# Altium PCB PCB1.PcbDoc
Units mm, origin at the board's own origin, x right, y up, seen from the top; angles counter-clockwise.
Board outline 74.3 x 37.72 mm, 2 copper layers (Top Layer, Bottom Layer); 7 components, 10 nets, 33 pads, 0 vias.
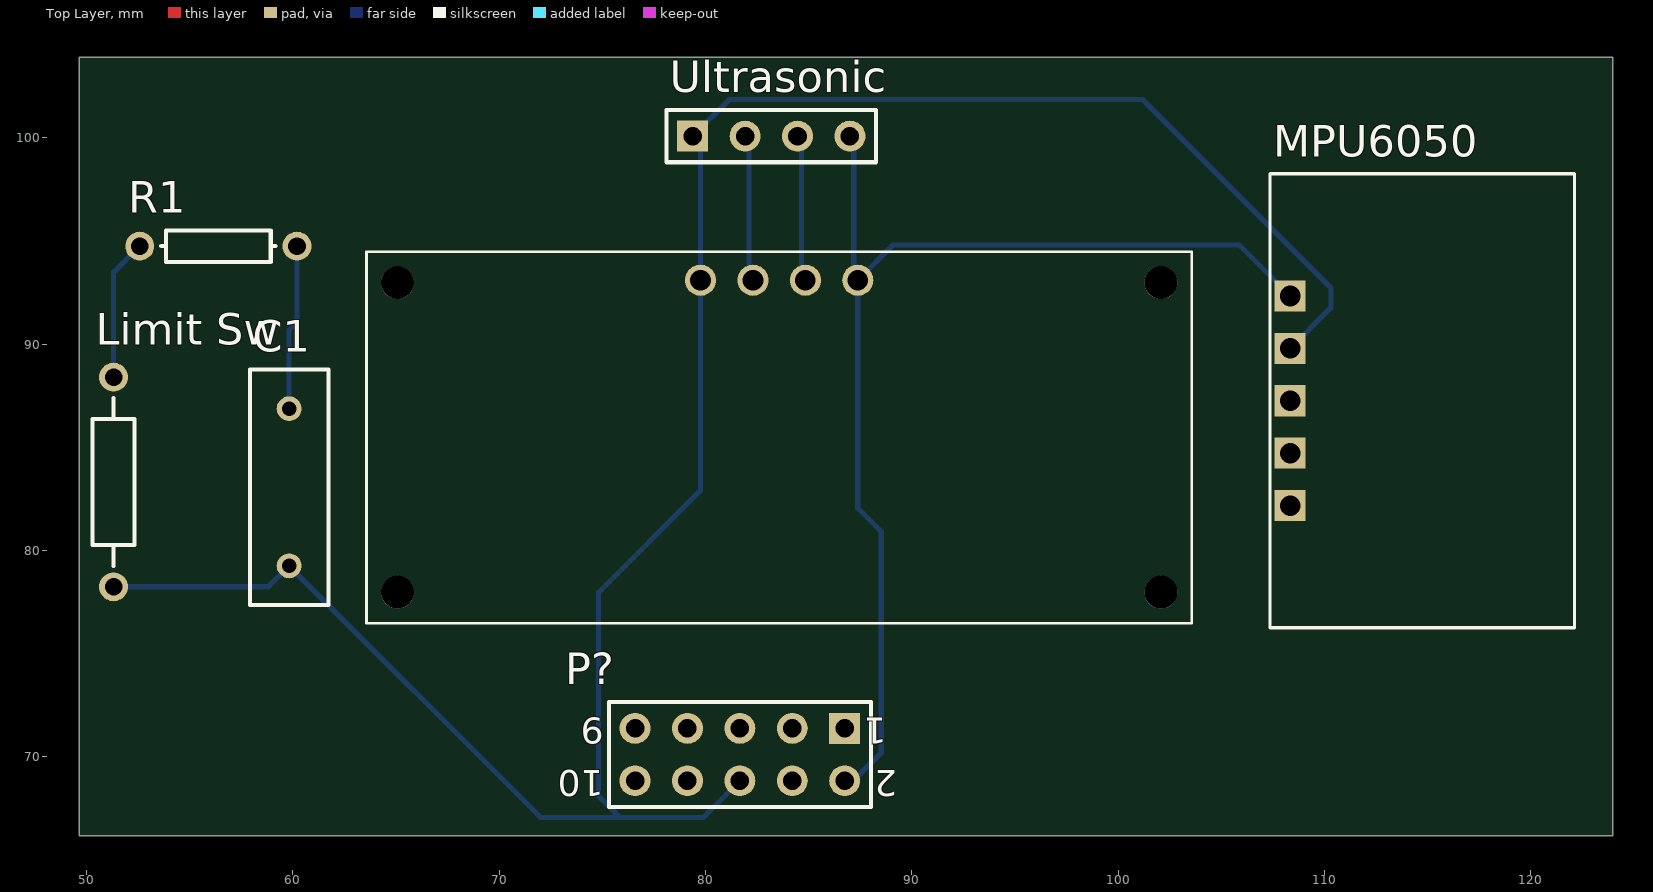
[diagram p0: Top Layer view]
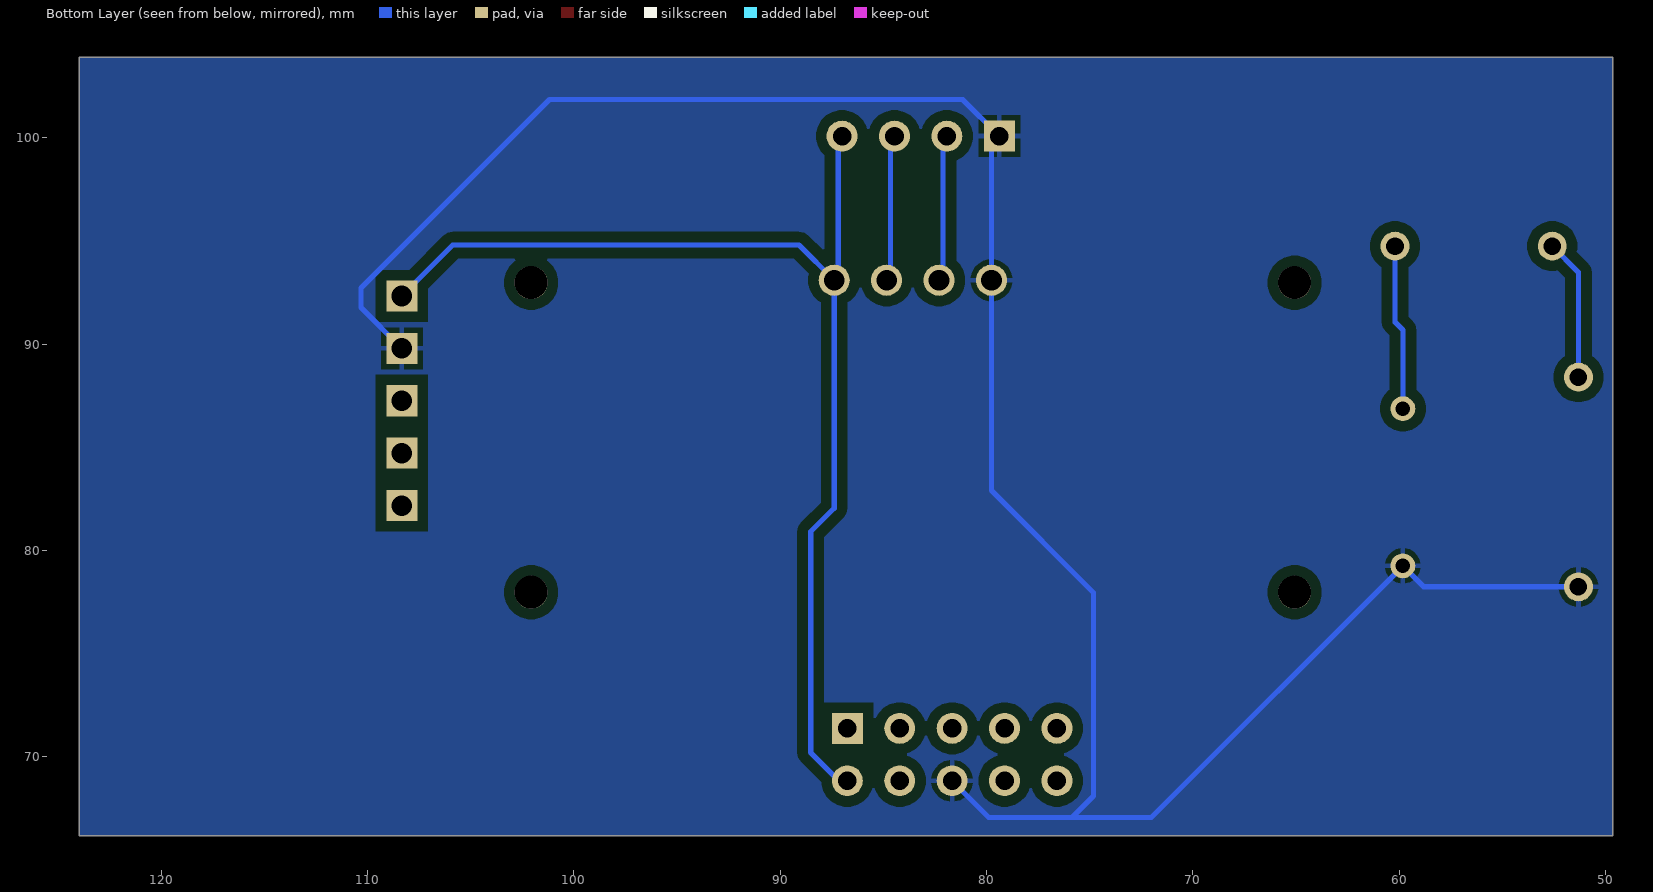
[diagram p1: Bottom Layer view, seen from below]

## Layer stack, top to bottom
Top Solder: solder mask 0.0102, Solder Resist, Dk 3.5
Top Layer: signal copper 0.0356
Dielectric 1: dielectric 0.32, FR-4, Dk 4.8
Bottom Layer: signal copper 0.0356
Bottom Solder: solder mask 0.0102, Solder Resist, Dk 3.5

## Board outline
49.657,66.167 123.952,66.167 123.952,103.886 49.657,103.886

## Design rules (kind name [scope] priority, off if disabled: settings)
Clearance [All] p1: gap=0.5 ignorepadtopadclearanceinfootprint=FALSE
HoleToHoleClearance [All] p1: gap=0.5 allowstackedmicrovias=TRUE
PolygonConnect [All] p1: connectstyle=Relief reliefconductorwidth=0.254 reliefentries=4 polygonreliefangle="90 Angle" airgapwidth=0.254
RoutingLayers [All] p1: top layer_v5=FALSE bottom layer_v5=TRUE
RoutingVias [All] p1: holewidth=0.711 width=1.27 viastyle="Through Hole" minholewidth=0.711 minwidth=1.27 maxholewidth=0.711 maxwidth=1.27
ShortCircuit [All] p1: allowed=TRUE
SolderMaskExpansion [All] p1: expansion=0.102 istentingtop=FALSE
Width [All] p1: maxlimit=0.254 minlimit=0.254 preferedwidth=0.254
27 further rules are at their usual default settings.

## Components (designator, comment, footprint, x,y, rotation, side; value= is the part's Value field where it differs from the comment)
C1 "Cap" RAD-0.3 59.817,83.058 r90 top value=100pF
"Limit Sw" "Res2" AXIAL-0.4 51.308,83.312 r90 top
MPU6050 "MPU6050" SEN0142 109.601,87.249 r270 top
P? "Header 5X2" HDR2X5 86.741,71.374 r180 top
R1 "Res1" AXIAL-0.3 56.388,94.742 r0 top value=1K
Ultrasonic "Header 4" HDR1X4 79.375,100.076 r0 top
? "4007" MODULE_4007 83.566,85.471 r180 top

## Footprints (in the part's own frame and the unit in brackets; to place one, negate y for a bottom-side part, rotate by r counter-clockwise, add the part's x,y. Pads: shape width x height; smd on the part's side, far side on the other; paste and mask are expansions set on the pad)
AXIAL-0.3 [mm] "Axial Device, Thru-Hole; 2 Leads; 0.3 in Pin Spacing"
  round 1.4 hole 0.85: 1(-3.81,0) 2(3.81,0)
  silkscreen extent -2.77,-0.76 2.77,0.76
AXIAL-0.4 [mm] "Axial Device, Thru-Hole; 2 Leads; 0.4 in Pin Spacing"
  round 1.4 hole 0.85: 1(-5.08,0) 2(5.08,0)
  silkscreen extent -4.06,-1.02 4.06,1.02
HDR1X4 [mm] "Connector; Header; 4 Position"
  rect 1.5x1.5 hole 0.9: 1(0,0)
  round 1.5 hole 0.9: 2(2.54,0) 3(5.08,0) 4(7.62,0)
  silkscreen extent -1.27,-1.27 8.89,1.27
HDR2X5 [mm] "Connector; Header; 5x2 Position"
  rect 1.5x1.5 hole 0.9: 1(0,0)
  round 1.5 hole 0.9: 2(0,2.54) 3(2.54,0) 4(2.54,2.54) 5(5.08,0) 6(5.08,2.54) 7(7.62,0) 8(7.62,2.54) 9(10.16,0) 10(10.16,2.54)
  silkscreen extent -1.27,-1.27 11.43,3.81
MODULE_4007 [mm]
  round 1.508 hole 1: 1(-3.81,-7.62) 2(-1.27,-7.62) 3(1.27,-7.62) 4(3.81,-7.62)
  round 1.6 hole 1.6 unplated: ""(-18.5,-7.5) ""(-18.5,7.5) ""(18.5,-7.5) ""(18.5,7.5)
  silkscreen extent -20,-9 20,9
RAD-0.3 [mm] "Radial Cap, Thru-Hole; 2 Leads; 0.3 in Pin Spacing"
  round 1.2 hole 0.7: 1(-3.81,0) 2(3.81,0)
  silkscreen extent -5.71,-1.91 5.71,1.91
SEN0142 [mm]
  rect 1.508x1.508 / inner round 1.508 / far side rect 1.508x1.508 hole 1: 1(-5.08,-1.27) 2(-2.54,-1.27) 3(0,-1.27) 4(2.54,-1.27) 5(5.08,-1.27)
  silkscreen extent -11,-2.25 11,12.5

## Part data
C1: "Capacitor", LatestRevisionDate=17-Jul-2002, LatestRevisionNote="Re-released for DXP Platform.", PackageDescription="Radial Cap, Thru-Hole; 2 Leads; 0.3 in Pin Spacing", PackageReference=RAD-0.3, Published=8-Jun-2000, Publisher="Altium Limited"
"Limit Sw" R1: "Resistor", LatestRevisionDate=17-Jul-2002, LatestRevisionNote="Re-released for DXP Platform.", Published=8-Jun-2000, Publisher="Altium Limited"
  "Limit Sw": PackageDescription="Axial Device, Thru-Hole; 2 Leads; 0.4 in Pin Spacing", PackageReference=AXIAL-0.4
  R1: PackageDescription="Axial Device, Thru-Hole; 2 Leads; 0.3 in Pin Spacing", PackageReference=AXIAL-0.3
MPU6050: library part SEN0142, "MPU-6050 series Accelerometer, Gyroscope, 3 Axis Sensor Evaluation Board", Package=None, Check_prices=https://www.snapeda.com/parts/SEN0142/DFRobot/view-part/?ref=eda, MF=DFRobot, MP=SEN0142, SnapEDA_Link=https://www.snapeda.com/parts/SEN0142/DFRobot/view-part/?ref=snap
P?: "Header, 5-Pin, Dual row", LatestRevisionDate=17-Jul-2002, LatestRevisionNote="Re-released for DXP Platform.", Publisher="Altium Limited"
Ultrasonic: "Header, 4-Pin", LatestRevisionDate=17-Jul-2002, LatestRevisionNote="Re-released for DXP Platform.", Publisher="Altium Limited"
?: "Ultrasonic Distance Sensor - 3V or 5V - HC-SR04 compatible - RCWL-1601", Package=None, Check_prices=https://www.snapeda.com/parts/4007/Adafruit+Industries+LLC/view-part/?ref=eda, MF="Adafruit Industries", MP=4007, SnapEDA_Link=https://www.snapeda.com/parts/4007/Adafruit+Industries+LLC/view-part/?ref=snap

## Nets (pads, with @x,y where several pads share a name; then routed paths per layer and width w, separated by ;. In a path a pad name is that pad's centre, name@x,y a point inside that pad or via, vN(x,y) a via of type N, cw(c..) or ccw(c..) an arc to the next point about the centre after c; other vN are vias at no path point)
+5: ?.1 MPU6050.1 P?.2 Ultrasonic.4 | length 55.5
  Bottom Layer w0.254: P?.2 86.979,69.072 87.392,69.072 88.518,70.199 88.518,80.904 87.376,82.046 ?.1 ; Ultrasonic.4 87.185,99.885 87.185,93.281 ?.1 ; MPU6050.1 105.862,94.798 89.083,94.798 ?.1
GND: "Limit Sw.1" ?.4 C1.1 MPU6050.2 P?.6 Ultrasonic.1 | length 111.4
  Bottom Layer w0.254: 51.308,78.232 58.801,78.232 C1.1 72.008,67.057 75.845,67.057 ; P?.6 79.884,67.057 75.845,67.057 ; MPU6050.2 110.306,91.764 110.306,92.716 101.169,101.853 81.152,101.853 Ultrasonic.1 79.756,99.695 ?.4 79.756,82.901 74.804,77.949 74.804,68.098 75.845,67.057
Net*_4: P?.5
Net*_13: ?.3 Ultrasonic.2 | length 7.1
  Bottom Layer w0.254: Ultrasonic.2 82.105,99.885 82.105,93.281 ?.3
Net*_14: ?.2 Ultrasonic.3 | length 7.1
  Bottom Layer w0.254: Ultrasonic.3 84.645,99.885 84.645,93.281 ?.2
Net*_15: C1.2 R1.2 | length 8
  Bottom Layer w0.254: C1.2 59.817,90.678 60.198,91.059 R1.2
Net*_31: P?.1
Net*_36: MPU6050.4
Net*_37: MPU6050.3
"NetLimit Sw_2": "Limit Sw.2" R1.1 | length 6.9
  Bottom Layer w0.254: 51.308,88.392 51.308,93.472 R1.1
pads on no net: ?. MPU6050.5 P?.3 P?.4 P?.7 P?.8 P?.9 P?.10

## Polygon pours and split planes (outlines as drawn)
GND on Bottom Layer "GND_L02_P000" (solid, remove dead copper, pour order 0): 49.657,103.886 49.657,66.167 123.952,66.167 123.952,103.886

## Text inside footprints (layer, text, board x,y; h text height)
P?: Top Overlay "10" at 75.057,69.342 h1.27 r180; Top Overlay "9" at 75.057,71.882 h1.27 r180; Top Overlay "1" at 88.773,71.882 h1.27 r180; Top Overlay "2" at 89.281,69.342 h1.27 r180